# EAGLE board Laptimer (EAGLE 6.3)
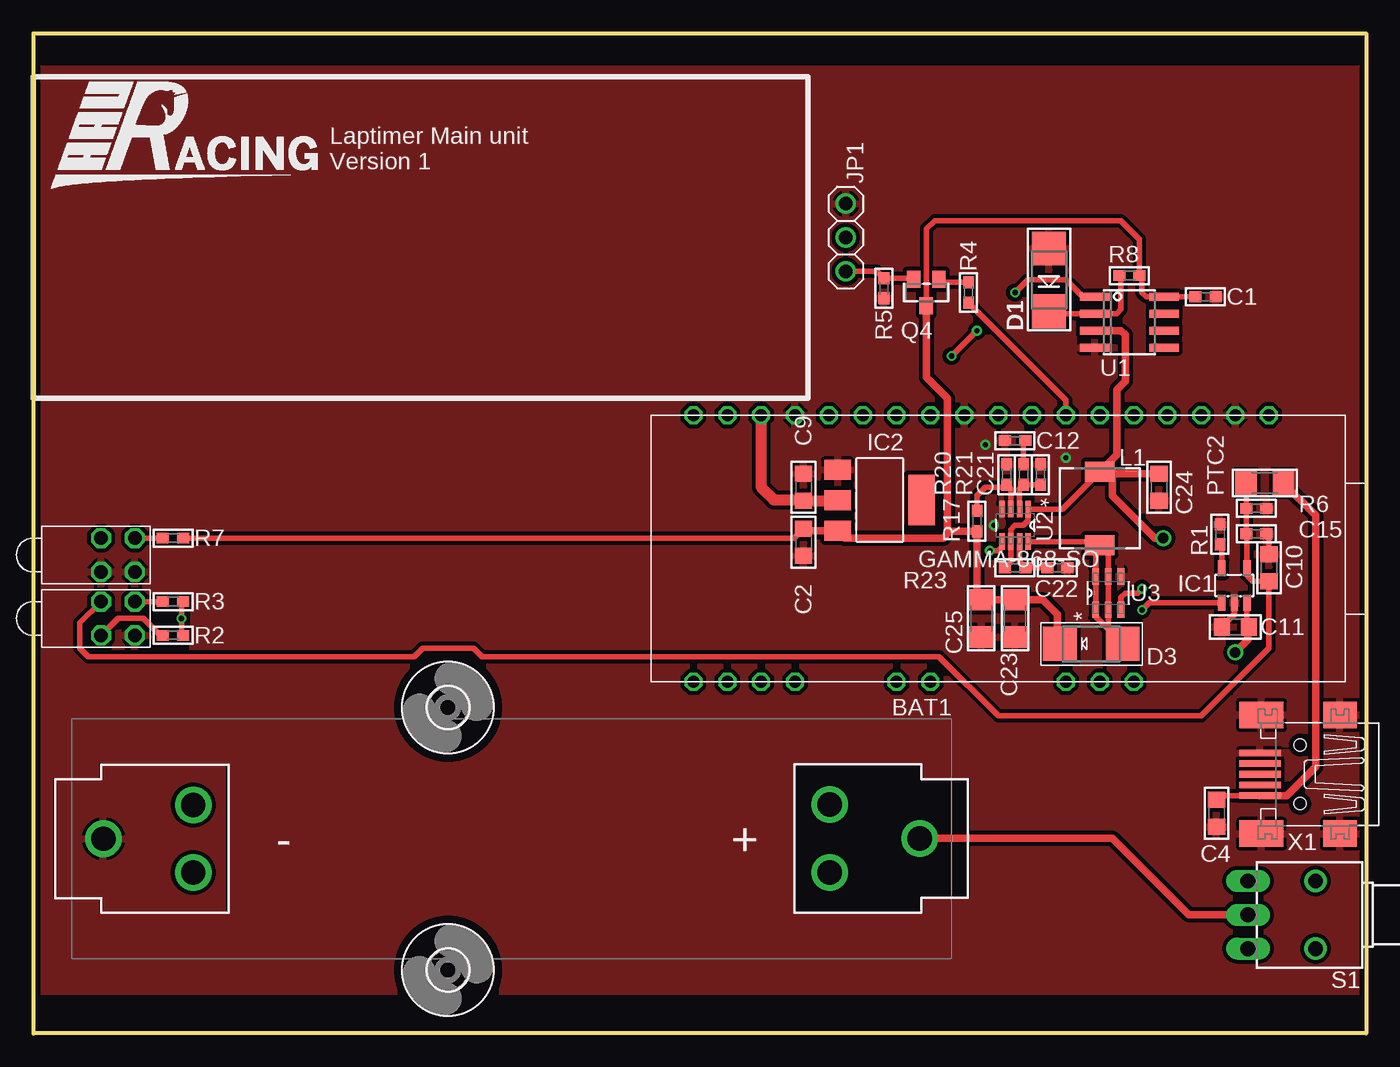
[diagram p0: board, top side]
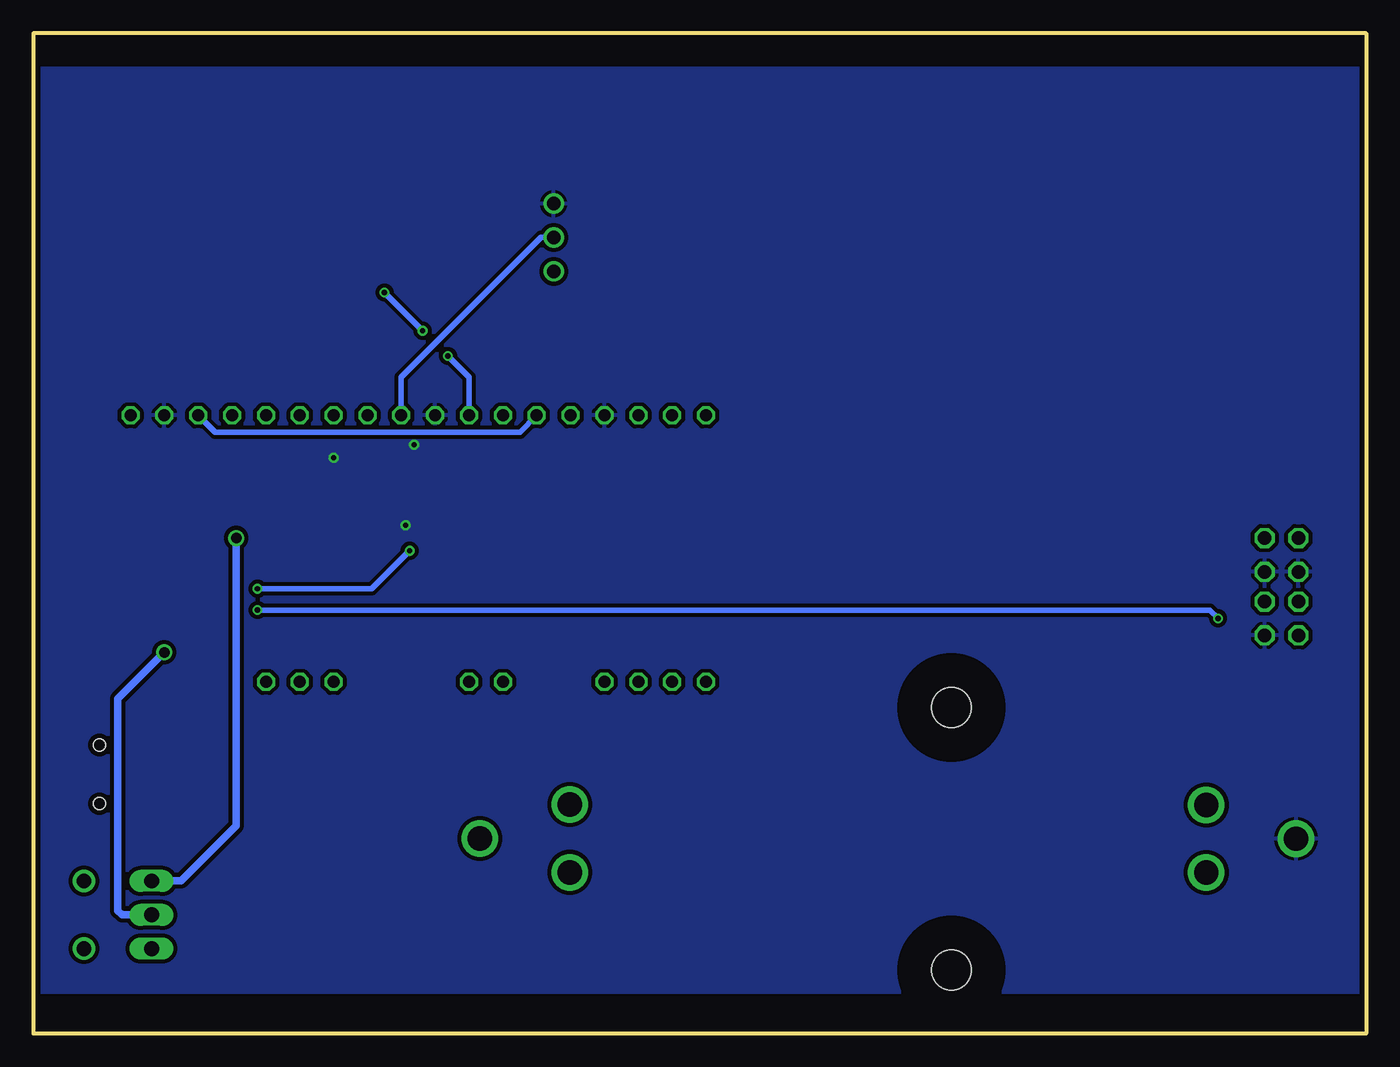
[diagram p1: board, bottom side, seen from below]

Size 100 x 75 mm. Coordinates in mm from the lower left corner, seen from the top.
Outline: 0,75 100,75 100,0 0,0 0,75
Copper layers (1*16): Top 0.0356mm / dielectric 1.5011mm / Bottom 0.0356mm
Design rules "LaenPCBOrder *": minimum track width 6mil, minimum drill 13mil, track to track 12mil, track to pad 12mil, pad to pad 12mil, via to via 12mil, smd to smd 12mil, copper to edge 15mil, drill to drill 6mil, minimum pad ring 7mil, minimum via ring 7mil, stop-mask expansion 3mil, vias tented up to drill 0mil, thermal gap 10mil

## Footprints (pad centres in the part's own frame; a part is rotated, then mirrored left to right if it is on the bottom)
BATTERY_18650-HOLDER = drill 1.829: GND@1 30.628,0.01; GND@2 23.88,2.55; GND@3 23.88,-2.53; PWR@1 -30.628,-0.01; PWR@2 -23.88,2.53; PWR@3 -23.88,-2.55
_0603 = smd 0.9 x 0.8: 1 -0.762,0; 2 0.762,0
_0805 = smd 1.2 x 1.3: 1 -1.016,0; 2 1.016,0
1206 = smd 1.6 x 1.8: 1 -1.4,0; 2 1.4,0
SMADIODE = smd 2.54 x 2.54: A 2.349,0; C -2.349,0
3,0 = hole 3: 0,0
SOT23-5L = smd 0.55 x 1.2: 1 -0.95,-1.3; 2 0,-1.3; 3 0.95,-1.3; 4 0.95,1.3; 5 -0.95,1.3
SOT223 = smd 1.499 x 2.007: 1 -2.261,-3.15; 2 0.025,-3.15; 3 2.311,-3.15 | smd 3.81 x 2.007: 4 0,3.15
1X03 = drill 1.016: 1 -2.54,0; 2 0,0; 3 2.54,0
INDUCTOR_6X6MM_TDK_SLF6045 = smd 1.5 x 2.2: P$1 -2.75,0; P$2 2.75,0
SOT23-WIDE = smd 1 x 1.27: 1 -0.95,-1; 2 0.95,-1; 3 0,1
TL3XWO = drill 1.1 pad 1.422 long: 1 -2.54,-5.08; 2 0,-5.08; 3 2.54,-5.08 | drill 1.1 pad 1.676: M1 -2.54,0; M2 2.54,0
SOIC8_150MIL = smd 0.6 x 2.2: 1 -1.905,-2.6; 2 -0.635,-2.6; 3 0.635,-2.6; 4 1.905,-2.6; 5 1.905,2.6; 6 0.635,2.6; 7 -0.635,2.6; 8 -1.905,2.6
SOT65P280X100-8N = smd 1.219 x 0.406: 1 -1.219,0.965; 2 -1.219,0.33; 3 -1.219,-0.33; 4 -1.219,-0.965; 5 1.219,-0.965; 6 1.219,-0.33; 7 1.219,0.33; 8 1.219,0.965
SOT95P285X110-6N = smd 1.219 x 0.508: 1 -1.245,0.94; 2 -1.245,0; 3 -1.245,-0.94; 4 1.245,-0.94; 5 1.245,0; 6 1.245,0.94
UNICORN_V2_GAMMA-868-SO = drill 0.9 octagon: P$1 0,0; P$2 2.54,0; P$3 5.08,0; P$4 7.62,0; P$5 10.16,0; P$6 12.7,0; P$7 15.24,0; P$8 17.78,0; P$9 20.32,0; P$10 22.86,0; P$11 25.4,0; P$12 27.94,0; P$13 30.48,0; P$14 33.02,0; P$15 35.56,0; P$16 38.1,0; P$17 40.64,0; P$18 43.18,0; P$19 43.18,20.003; P$20 40.64,20.003; P$21 38.1,20.003; P$22 35.56,20.003; P$23 27.94,20.003; P$24 25.4,20.003; P$25 15.24,20.003; P$26 12.7,20.003; P$27 10.16,20.003
BI-LEVEL-LED-INDICATOR = drill 1 octagon: ANODE1 1.27,1.27; ANODE2 1.27,-1.27; CATHODE1 -1.27,1.27; CATHODE2 -1.27,-1.27
32005-301 = smd 3.1 x 0.5: 1 3,1.6; 2 3,0.8; 3 3,0; 4 3,-0.8; 5 3,-1.6 | smd 2.5 x 2: M1 -3,-4.45; M2 -3,4.45 | smd 3.3 x 2: M3 2.9,4.45; M4 2.9,-4.45 | hole 0.9: 0,2.2; 0,-2.2

## Placement (x,y rotation side)
BAT1  [BATTERY_18650-HOLDER]  35.88,14.61 180 top
C1  100n  [_0603]  87.95,55.24 0 top
C2  10u  [_0805]  57.78,36.83 270 top
C4  22u  [_0805]  88.77,16.51 270 top
C9  22u  [_0805]  57.78,40.96 90 top
C10  10u  [_0805]  92.71,34.92 270 top
C11  10u  [_0805]  90.17,30.48 180 top
C12  1n8  [_0603]  73.66,44.45 0 top
C15  100n  [_0603]  91.76,37.47 0 top
C21  47p  [_0603]  75.56,41.91 270 top
C22  1n  [_0603]  76.83,34.92 180 top
C23  100u  [1206]  73.66,31.11 270 top
C24  10u  [_0805]  84.45,40.96 90 top
C25  100u  [1206]  71.12,31.11 270 top
D1  3V  [SMADIODE]  76.2,56.52 90 top
D3  B320  [SMADIODE]  79.38,29.21 0 top
H1  MOUNT-HOLE3.0  [3,0]  31.11,24.45 0 top
H2  MOUNT-HOLE3.0  [3,0]  31.11,4.76 0 top
IC1  MCP73831/OT  [SOT23-5L]  90.11,33.58 0 top
IC2  REG1117  [SOT223]  63.5,40.01 270 top
JP1  [1X03]  60.96,59.69 90 top
L1  FDVE0630-H-1R0M  [INDUCTOR_6X6MM_TDK_SLF6045]  80.01,39.37 90 top
PTC2  [1206]  92.39,41.27 0 top
Q4  PBSS4120T  [SOT23-WIDE]  66.99,55.56 180 top
R1  2k  [_0603]  89.03,37.43 90 top
R2  470  [_0603]  10.48,29.84 0 top
R3  1k  [_0603]  10.48,32.38 0 top
R4  1k  [_0603]  70.17,55.56 90 top
R5  1k  [_0603]  63.82,55.88 270 top
R6  10k  [_0603]  91.76,39.37 0 top
R7  220  [_0603]  10.48,37.15 180 top
R8  2k  [_0603]  82.23,56.83 180 top
R17  34k8  [_0603]  70.8,38.42 90 top
R20  11k  [_0603]  73.03,41.91 90 top
R21  17k4  [_0603]  74.3,41.91 90 top
R23  1m  [_0603]  73.66,34.92 180 top
S1  TL36WO  [TL3XWO]  96.2,8.89 270 top
U1  [SOIC8_150MIL]  82.23,53.34 270 top
U2  LTC3872ETS8TRMPBF  [SOT65P280X100-8N]  73.66,38.1 270 top
U3  SI3460DDV-T1-GE3  [SOT95P285X110-6N]  80.64,33.02 90 top
U$7  GAMMA-868-SO  [UNICORN_V2_GAMMA-868-SO]  92.71,46.35 180 top
U$13  BI-LEVEL-LED-INDICATOR  [BI-LEVEL-LED-INDICATOR]  6.35,31.11 90 top
U$14  BI-LEVEL-LED-INDICATOR  [BI-LEVEL-LED-INDICATOR]  6.35,35.88 90 top
X1  mini-usb  [32005-301]  95.03,19.43 180 top

## Library data of the parts
BAT1 = SparkFun-Electromechanical
C1 C2 C4 C9-C12 C15 C21-C25 D1 L1 PTC2 Q4 R1-R8 R17 R20 R21 R23 U1 = microbuilder
D3 IC1 JP1 = adafruit
H1 H2 = holes
IC2 = burr-brown; MPN: REG1117; OC_FARNELL: 1097566; OC_NEWARK: 14P6981
S1 = switch
U2 = LTC_By_element14_Batch_1; MPN: LTC3872ETS8#TRMPBF; OC_FARNELL: 1556409; OC_NEWARK: 56M8617; PACKAGE: SOT-23-8; SUPPLIER: LINEAR TECHNOLOGY
U3 = Vishay_By_element14_Batch_1; MPN: SI3457CDV-T1-GE3; OC_FARNELL: 1840420; OC_NEWARK: 90R9127; PACKAGE: TSOP-6; SUPPLIER: Vishay Siliconix
U$7 U$13 U$14 = unicorn_v2
X1 = con-cypressindustries; OC_FARNELL: unknown; OC_NEWARK: unknown

## Nets
3.3V: C9.1 IC2.2 U$7.P$16
5.0V: C1.1 C2.1 C23.1 C25.1 D3.C IC2.3 Q4.3 R7.1 R8.1 R17.1 U1.8
+UB: C10.2 C15.1 IC1.4 PTC2.1 R6.1 U$13.ANODE1
BAT-ADC: BAT1.PWR@1 C11.1 IC1.3 S1.2
CHRG-DONE-LED: R3.1 U$13.ANODE2
CT: U$7.P$3 U$7.P$13
GND: BAT1.GND@1 C1.2 C2.2 C4.2 C9.2 C10.1 C11.2 C12.1 C15.2 C21.1 C22.1 C23.2 C24.1 C25.2 D1.A IC1.2 IC2.1 JP1.3 R1.2 R5.2 R6.2 R20.2 U1.4 U2.4 U3.4 U$7.P$2 U$7.P$10 U$7.P$15 U$13.CATHODE2 U$14.CATHODE1 U$14.CATHODE2 X1.5 X1.M1 X1.M2 X1.M3 X1.M4
LASER: R4.1 U$7.P$7
MOSD: D3.A L1.P$1 U2.8 U3.1 U3.2 U3.5 U3.6
N$1: R17.2 R20.1 U2.3
N$2: C12.2 R21.2
N$3: IC1.5 R1.1
N$4: IC1.1 R2.2 R3.2
N$5: JP1.1 Q4.2 R5.1
N$6: Q4.1 R4.2
N$7: D1.C R8.2 U1.2
N$8: U2.5 U3.3
N$13: C4.1 PTC2.2 X1.1
N$14: R2.1 U$13.CATHODE1
N$27: C21.2 R21.1 U2.2
N$29: C22.2 R23.1 U2.7
N$32: R7.2 U$14.ANODE2
PT-IN: JP1.2 U$7.P$9
RLB: U1.1 U$7.P$11
VBAT: C24.2 L1.P$2 R23.2 S1.1 U1.3 U2.1 U2.6

## Tracks (layer width: path | path; a pad name or v marks a point on that pad's centre or on a via)
3.3V
  Top 0.813: U$7.P$16 54.61,40.96 55.56,40.01 57.72,40.01 C9.1 60.31,39.94 IC2.2
5.0V
  Top 0.406: Q4.3 66.99,60.33 67.63,60.96 81.6,60.96 83,59.56 R8.1 83.19,56.64 83.19,55.56 83.5,55.24 U1.8 C1.1 | R7.1 57.09,37.15 C2.1
  Top 0.559: Q4.3 66.99,49.21 68.58,47.62 68.58,37.47 | 68.58,37.47 68.26,37.15 60.9,37.15 IC2.3 57.94,37.69 C2.1 | 68.58,37.47 68.77,37.66 R17.1 70.8,32.83 C25.1 C23.1 75.75,32.52 76.83,31.43 76.83,29.4 D3.C
+UB
  Top 0.406: PTC2.1 R6.1 C15.1 91.06,37.4 IC1.4 91.12,34.82 91.12,34.29 91.5,33.91 C10.2 92.71,28.89 87.63,23.81 72.39,23.81 67.94,28.26 33.66,28.26 33.02,28.89 29.21,28.89 28.57,28.26 4.13,28.26 3.49,28.89 3.49,30.8 U$13.ANODE1
BAT-ADC  (via drill 0.8)
  Top 0.406: IC1.3 91.06,30.61 C11.1
  Top 0.559: BAT1.PWR@1 80.95,14.62 86.68,8.89 S1.2 | v90.17,28.57 91.12,29.53 91.12,30.42 C11.1
  Bottom 0.559: S1.2 93.34,8.89 93.66,9.21 93.66,25.08 v90.17,28.57
CHRG-DONE-LED
  Top 0.406: R3.1 U$13.ANODE2
CT
  Bottom 0.406: U$7.P$13 63.5,45.09 86.36,45.09 U$7.P$3
GND  (via drill 0.38)
  Top 0.406: C10.1 92.71,37.27 C15.2 | IC1.2 90.11,31.43 C11.2
  other vias: 71.44,44.13 77.47,43.18 72.07,38.1
  pour Top: 0,72.33 100.14,72.33 100.14,3.12 0.13,3.12
  pour Bottom: 0,72.33 100.14,72.33 100.14,3.12 0.13,3.12
LASER
  Top 0.406: U$7.P$7 77.47,47.5 R4.1
MOSD
  Top 0.406: U2.8 79.75,36.88 L1.P$1 | U3.6 79.7,36.31 L1.P$1 | L1.P$1 80.22,36.83 80.64,36.83 U3.5 U3.2 80.64,30.29 | 80.64,30.29 D3.A | 80.64,30.29 79.7,31.23 U3.1 79.7,34.28 79.69,34.29
N$1
  Top 0.406: U2.3 73.33,40.84 R20.1 72.83,40.96 71.44,40.96 70.8,40.32 R17.2
N$2
  Top 0.406: R21.2 74.3,44.32 C12.2
N$3
  Top 0.406: IC1.5 89.16,36.55 R1.1
N$4  (via drill 0.38)
  Top 0.406: IC1.1 83.72,32.28 v83.19,31.75 | R2.2 11.11,29.97 v11.11,31.11 11.11,32.38 R3.2
  Bottom 0.406: v83.19,31.75 11.75,31.75 v11.11,31.11
N$5
  Top 0.406: JP1.1 63.31,57.15 R5.1 65.96,56.64 Q4.2
N$6
  Top 0.406: R4.2 68.18,56.33 Q4.1
N$7
  Top 0.406: R8.2 81.6,56.71 81.6,54.29 81.28,53.98 U1.2 76.39,53.98 D1.C
N$8  (via drill 0.38)
  Top 0.406: U3.3 81.58,32.69 81.92,33.02 82.87,33.02 v83.19,33.34 | v71.75,36.2 72.39,36.2 72.71,36.51 72.71,36.87 U2.5
  Bottom 0.406: v83.19,33.34 74.61,33.34 v71.75,36.2
N$13
  Top 0.406: X1.1 88.77,17.83 C4.1
  Top 0.559: X1.1 94.03,17.83 96.2,20 96.2,38.87 PTC2.2
N$14
  Top 0.406: R2.1 9.53,29.84 8.26,31.11 6.35,31.11 U$13.CATHODE1
N$27
  Top 0.406: U2.2 73.99,40.84 R21.1 C21.2
N$29
  Top 0.406: U2.7 73.99,35.36 R23.1 C22.2
N$32
  Top 0.406: U$14.ANODE2 R7.2
PT-IN
  Bottom 0.406: U$7.P$9 72.39,49.21 61.91,59.69 JP1.2
RLB  (via drill 0.38)
  Top 0.406: U1.1 78.74,55.24 77.47,56.52 74.61,56.52 v73.66,55.56 | v70.8,52.7 v68.9,50.8
  Bottom 0.406: v73.66,55.56 v70.8,52.7 | v68.9,50.8 67.31,49.21 U$7.P$11
VBAT  (via drill 0.8)
  Top 0.406: R23.2 73.33,35.36 U2.6 73.33,37.77 73.66,38.1 74.3,38.1 74.62,38.43 U2.1 77.21,39.32 L1.P$2
  Top 0.559: U1.3 81.6,52.7 81.92,52.39 81.92,48.9 81.28,48.26 81.28,43.39 L1.P$2 80.16,41.97 80.64,41.97 | C24.2 80.64,41.97 | v84.77,37.15 84.14,37.15 80.96,40.32 80.96,41.66 80.64,41.97
  Bottom 0.559: S1.1 88.9,11.43 84.77,15.56 v84.77,37.15

## Text on the board
tSilk: Laptimer Main unit / Version 1